# EAGLE board irisc (EAGLE 9.2.2)
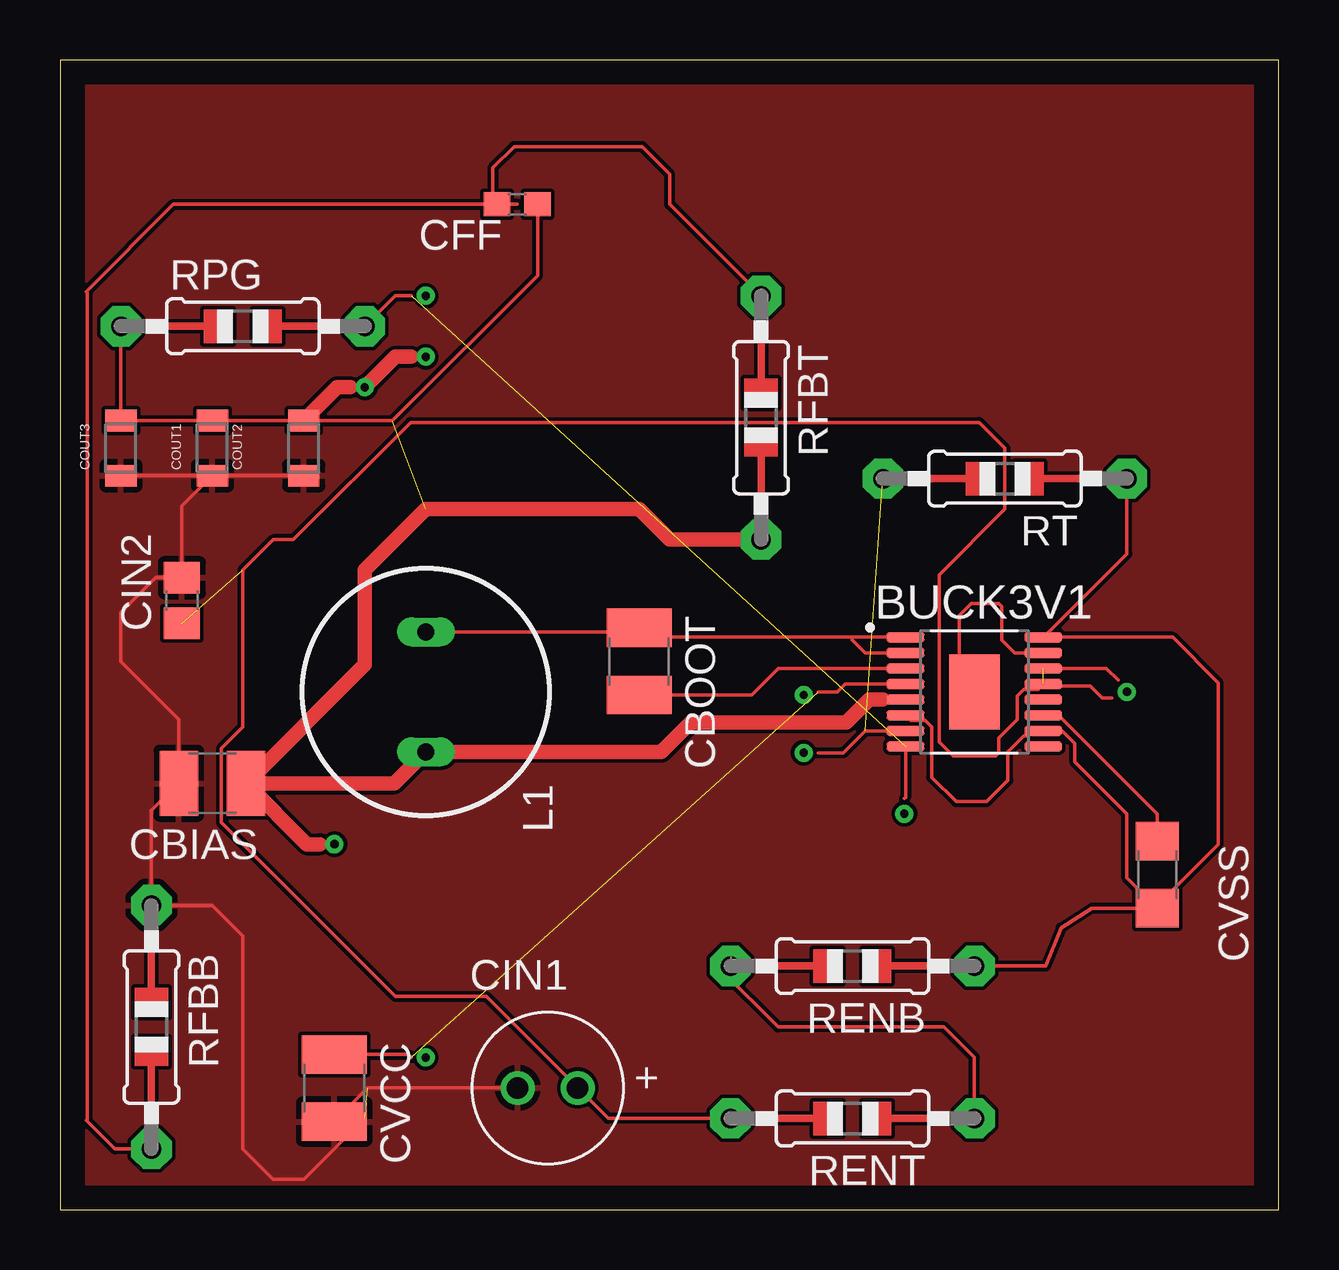
[diagram p0: board, top side]
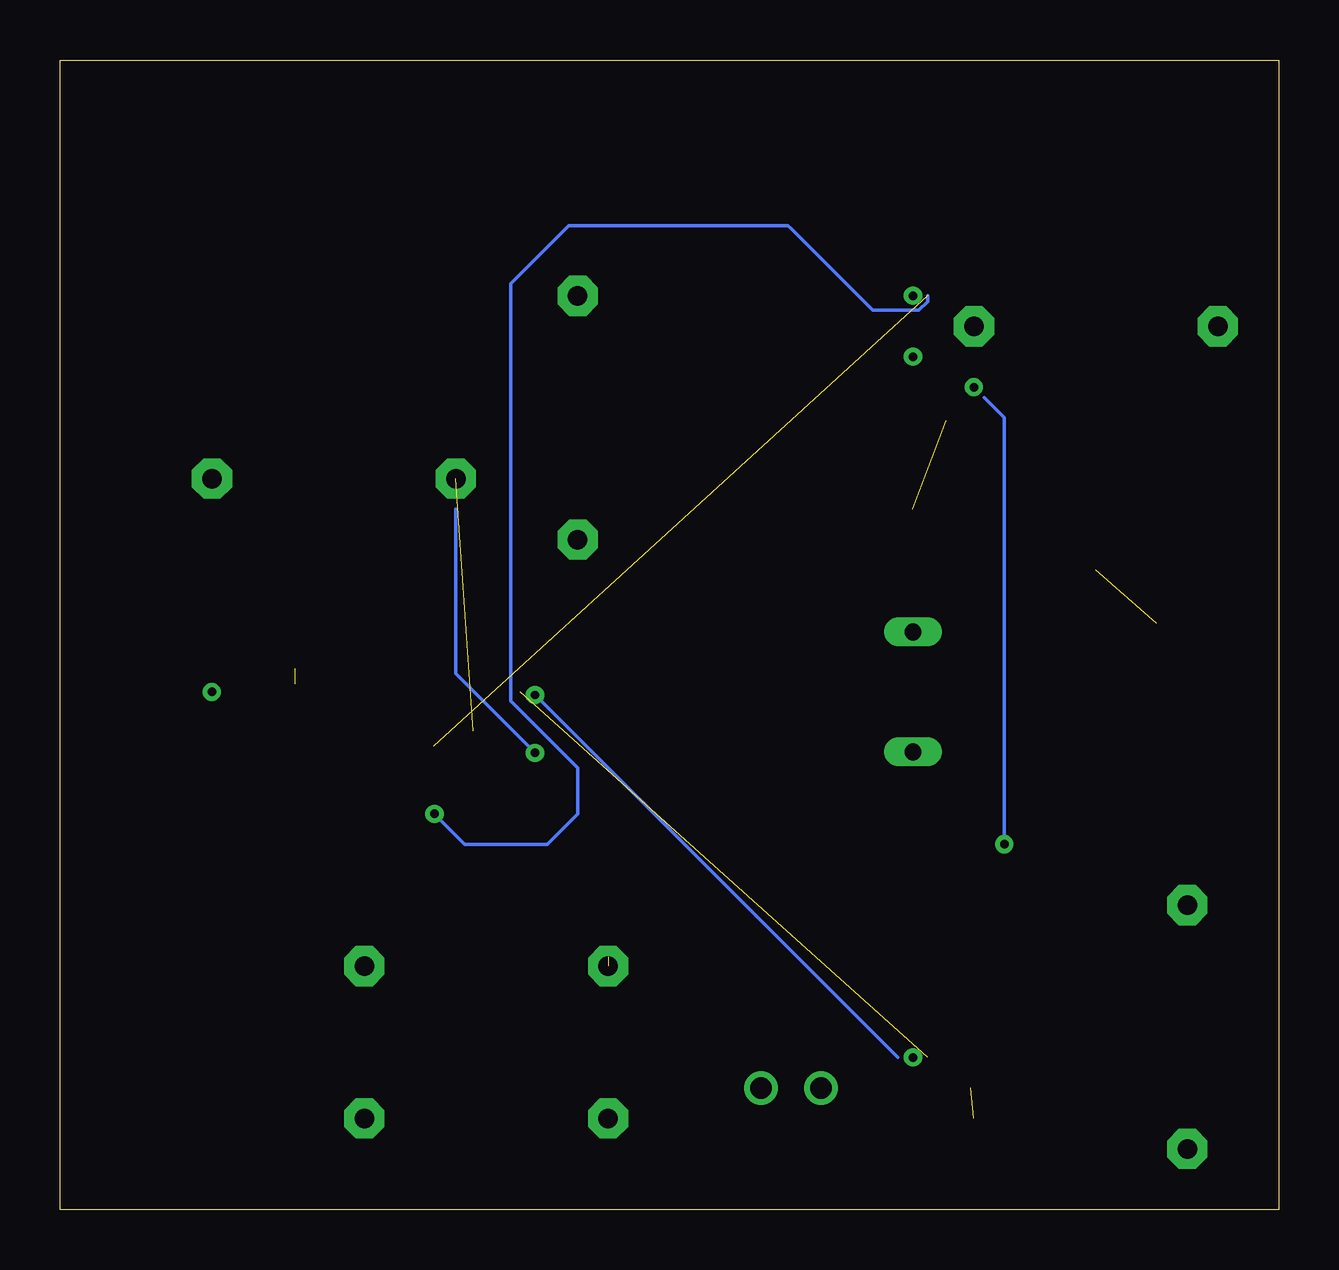
[diagram p1: board, bottom side, seen from below]

Size 50.78 x 47.93 mm. Coordinates in mm from the lower left corner, seen from the top.
Outline: 0,0 50.78,0 50.78,47.93 0,47.93 0,0
Copper layers (1*16): Top 0.035mm / dielectric 1.5mm / Bottom 0.035mm
Design rules "default": minimum track width 6mil, minimum drill 0.35mm, track to track 6mil, track to pad 6mil, pad to pad 6mil, via to via 6mil, smd to smd 6mil, copper to edge 40mil, drill to drill 6mil, minimum pad ring 10mil, minimum via ring 8mil, stop-mask expansion 4mil, vias tented up to drill 0mil, thermal gap 10mil

## Footprints (pad centres in the part's own frame; a part is rotated, then mirrored left to right if it is on the bottom)
SOP65P640X120-17N = smd 1.57 x 0.41: 1 -2.87,2.275; 2 -2.87,1.625; 3 -2.87,0.975; 4 -2.87,0.325; 5 -2.87,-0.325; 6 -2.87,-0.975; 7 -2.87,-1.625; 8 -2.87,-2.275; 9 2.87,-2.275; 10 2.87,-1.625; 11 2.87,-0.975; 12 2.87,-0.325; 13 2.87,0.325; 14 2.87,0.975; 15 2.87,1.625; 16 2.87,2.275 | smd 2.105 x 3.115: 17 0,0
C1210 = smd 1.6 x 2.7: 1 -1.4,0; 2 1.4,0
C0603 = smd 1.1 x 1: 1 -0.85,0; 2 0.85,0
6.3X2.5X0.9(DXAXB) = drill 0.9: 1 1.25,0; 2 -1.25,0
C0805 = smd 1.3 x 1.5: 1 -0.95,0; 2 0.95,0
WCAP-CSGP_0805_WAVE = smd 0.9 x 1.3: 1 -1.15,0; 2 1.15,0
C1206 = smd 1.6 x 1.8: 1 -1.4,0; 2 1.4,0
BS11 = drill 0.7 long: 1 -2.5,0; 2 2.5,0
0805-THM = drill 0.813 pad 1.676 octagon: 1 -5.08,0; 2 5.08,0

## Placement (x,y rotation side)
BUCK3V1  [SOP65P640X120-17N]  38.1,21.59 0 top
CBIAS  1 uF  [C1210]  6.35,17.78 180 top
CBOOT  0.47 uF  [C1210]  24.13,22.86 270 top
CFF  44pF  [C0603]  19.05,41.91 180 top
CIN1  0.1uF  [6.3X2.5X0.9(DXAXB)]  20.32,5.08 0 top
CIN2  10uF  [C0805]  5.08,25.4 90 top
COUT1  6 uF  [WCAP-CSGP_0805_WAVE]  6.35,31.75 90 top
COUT2  6 uF  [WCAP-CSGP_0805_WAVE]  10.16,31.75 90 top
COUT3  6 uF  [WCAP-CSGP_0805_WAVE]  2.54,31.75 90 top
CVCC  2.2 uF  [C1210]  11.43,5.08 270 top
CVSS  22nF  [C1206]  45.72,13.97 270 top
L1  [BS11]  15.24,21.59 270 top
RENB  1 M  [0805-THM]  33.02,10.16 180 top
RENT  1 M  [0805-THM]  33.02,3.81 180 top
RFBB  442 k  [0805-THM]  3.81,7.62 270 top
RFBT  1 M  [0805-THM]  29.21,33.02 270 top
RPG  10 k  [0805-THM]  7.62,36.83 0 top
RT  200 k  [0805-THM]  39.37,30.48 180 top

## Library data of the parts
BUCK3V1 = SOP65P640X120-17N
CBIAS CBOOT CFF CIN2 CVCC CVSS = eagle-ltspice; SPICEMODEL: NONE; SPICEPREFIX: C
CIN1 = Wurth_Elektronik_Passive_Capacitors_rev18b; WE-NUMBER: 870055673001/10uF
COUT1-COUT3 = Wurth_Elektronik_Passive_Capacitors_rev18b; SPICEPREFIX: C
L1 = inductor-neosid; OC_FARNELL: unknown; OC_NEWARK: unknown
RENB RENT RFBB RFBT RPG RT = adafruit; SPICEPREFIX: R

## Nets
3.3V: BUCK3V1.5 CBIAS.1 CFF.1 COUT1.2 COUT2.2 COUT3.2 L1.2 RFBT.2 RPG.1
GND: CBIAS.2 CIN1.2 CIN2.2 COUT1.1 COUT2.1 COUT3.1 CVCC.2 RFBB.1
N$1: BUCK3V1.1 BUCK3V1.2 CBOOT.1 L1.1
N$2: BUCK3V1.7 RT.2
N$3: BUCK3V1.11 CVSS.1
N$4: BUCK3V1.3 CBOOT.2
N$5: BUCK3V1.4 CVCC.1
N$6: BUCK3V1.9
N$8: CFF.2 RFBB.2 RFBT.1
N$9: BUCK3V1.12
N$11: BUCK3V1.8 RPG.2
N$130: RENB.2 RENT.1
PGND1: BUCK3V1.15 BUCK3V1.17
PGND2: BUCK3V1.6 BUCK3V1.10 BUCK3V1.16 CVSS.2 RENB.1 RT.1
VCC: BUCK3V1.13 BUCK3V1.14 CIN1.1 CIN2.1 RENT.2

## Tracks (layer width: path | path; a pad name or v marks a point on that pad's centre or on a via)
3.3V  (1 unrouted)
  Top 0.152: BUCK3V1.5 34.29,21.27 | CFF.1 19.9,38.95 13.85,32.9 COUT2.2 COUT1.2 COUT3.2 RPG.1 | 34.29,21.27
  Top 0.602: CBIAS.1 13.93,17.78 L1.2 25.06,19.09 26.29,20.32 32.77,20.32 33.71,21.27 34.29,21.27 | RFBT.2 25.4,27.94 24.13,29.21 15.24,29.21 12.7,26.67 12.7,22.73 CBIAS.1 | CBIAS.1 10.29,15.24 10.82,15.24 | COUT2.2 11.55,34.29 12.09,34.29
GND  (1 unrouted)
  Top 0.152: COUT1.1 5.08,29.33 CIN2.2 | CIN2.2 4.95,26.35 | 12.7,3.81 10.16,1.27 8.89,1.27 7.62,2.54 7.62,11.43 6.35,12.7 RFBB.1 3.81,16.64 CBIAS.2 4.95,20.45 2.54,22.86 2.54,24.89 4,26.35 CIN2.2 | CVCC.2 12.83,5.08 CIN1.2 | COUT1.1 COUT3.1 | COUT1.1 COUT2.1
  pour Top: 0,0 50.8,0 50.8,48.26 0,48.26
N$1
  Top 0.152: BUCK3V1.2 33.55,23.21 33.02,23.75 33.02,23.88 | 33.02,23.88 35.22,23.88 BUCK3V1.1 | 33.02,23.88 24.51,23.88 CBOOT.1 23.96,24.09 L1.1
N$2  (1 unrouted)
  Top 0.152: BUCK3V1.7 33.55,19.96 32.64,19.05 31.59,19.05
N$3
  Top 0.152: CVSS.1 45.72,16.51 41.66,20.57 41.01,20.57 BUCK3V1.11
N$4
  Top 0.152: BUCK3V1.3 29.93,22.57 28.83,21.46 CBOOT.2
N$5  (1 unrouted)
  Top 0.152: BUCK3V1.4 32.71,21.91 32.38,21.59 31.59,21.59 | CVCC.1 14.5,6.48 14.63,6.35
N$8
  Top 0.152: RFBB.2 2.29,2.54 1.14,3.68 | 1.14,3.68 1.09,3.73 | 1.14,3.68 1.14,38.23 1.09,38.28 4.72,41.91 CFF.2 18.41,41.91 | 19.05,41.91 18.41,41.91 | RFBT.1 25.4,41.91 25.4,43.18 24.26,44.32 18.92,44.32 18.03,43.43 18.03,42.29 18.41,41.91
N$11  (1 unrouted)
  Top 0.152: BUCK3V1.8 35.23,17.2 35.18,17.14 | RPG.2 13.97,38.1 14.63,38.1
N$12  (via drill 0.35)
  Bottom 0.152: v30.99,21.46 15.88,6.35
N$13  (via drill 0.35)
  Bottom 0.152: v35.18,16.51 33.91,15.24 30.48,15.24 29.21,16.51 29.21,18.41 32,21.21 32,38.61 29.59,41.02 20.45,41.02 20.32,40.89 16.92,37.49 14.99,37.49 14.63,37.85 14.63,38.1
N$14  (via drill 0.35)
  Bottom 0.152: v30.99,19.05 34.29,22.35 34.29,29.21
N$15  (via drill 0.35)
  other vias: 15.24,6.35
N$16  (via drill 0.35)
  Bottom 0.152: v11.43,15.24 11.43,33.02 12.27,33.86
N$17  (via drill 0.35)
  Top 0.602: v12.7,34.29 13.97,35.56 14.63,35.56
N$18  (via drill 0.35)
  other vias: 15.24,38.1
N$19  (via drill 0.35)
  other vias: 15.24,35.56
N$20  (via drill 0.35)
  other vias: 44.45,21.59
N$130  (1 unrouted)
  Top 0.152: RENT.1 38.1,6.35 36.83,7.62 29.92,7.62 27.54,10 27.54,10.32 27.76,10.54 27.94,10.54
PGND1
  Top 0.152: BUCK3V1.15 39.78,23.21 39.24,23.75 39.24,25.15 39.12,25.27 37.97,25.27 37.47,24.77 37.47,22.23 BUCK3V1.17
PGND2
  Top 0.152: CVSS.2 42.99,12.57 41.71,11.76 41.07,10.16 RENB.1 | RT.1 44.45,27.34 BUCK3V1.16 40.98,23.88 46.35,23.88 48.26,21.97 48.26,15.24 45.72,12.7 CVSS.2 | 35.9,20.61 BUCK3V1.6 35.45,20.4 36.05,20.4 36.32,20.13 36.32,18.03 37.34,17.02 38.61,17.02 39.5,17.91 39.5,19.09 40.15,19.75 40.32,19.75 40.51,19.94 40.94,19.94 BUCK3V1.10 41.76,19.96 42.29,19.43 42.29,18.67 44.45,16.51 44.45,13.84 CVSS.2
VCC  (2 unrouted)
  Top 0.152: RENT.2 22.84,3.81 CIN1.1 17.76,8.89 13.97,8.89 6.72,16.14 6.72,19.23 7.62,20.12 7.62,26.67 8.89,27.94 9.73,27.94 14.61,32.82 38.3,32.82 39.37,31.75 39.37,29.21 36.63,26.47 36.63,25.4 36.63,19.51 37.21,18.92 38.99,18.92 39.12,19.05 39.12,19.67 39.88,20.43 39.88,21.43 40.15,21.7 40.75,21.7 BUCK3V1.13 41.04,21.84 42.93,21.84 43.43,21.34 43.81,21.34 | BUCK3V1.14 43.6,22.57 44.08,22.08